# EAGLE board GF_RemoteDoorOpener_TX (EAGLE 7.5.0)
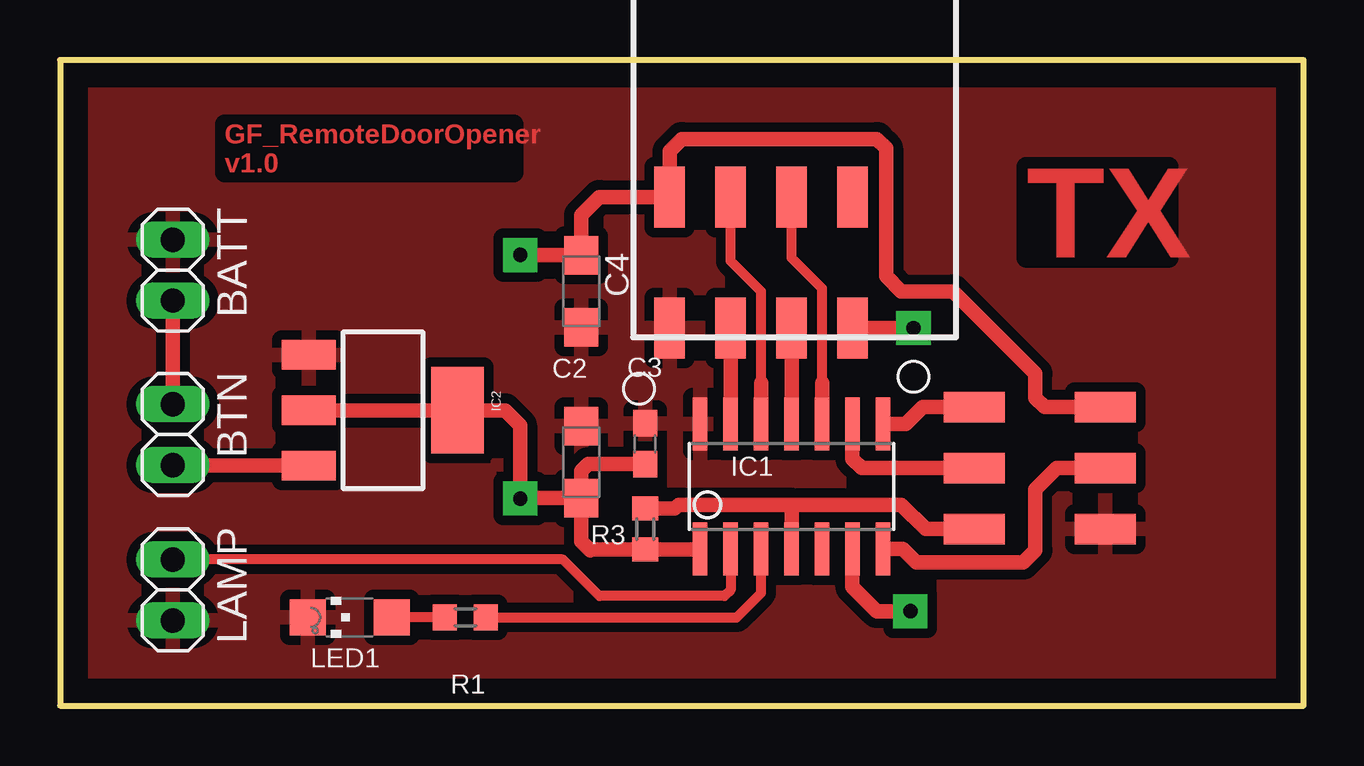
[diagram p0: board, top side]
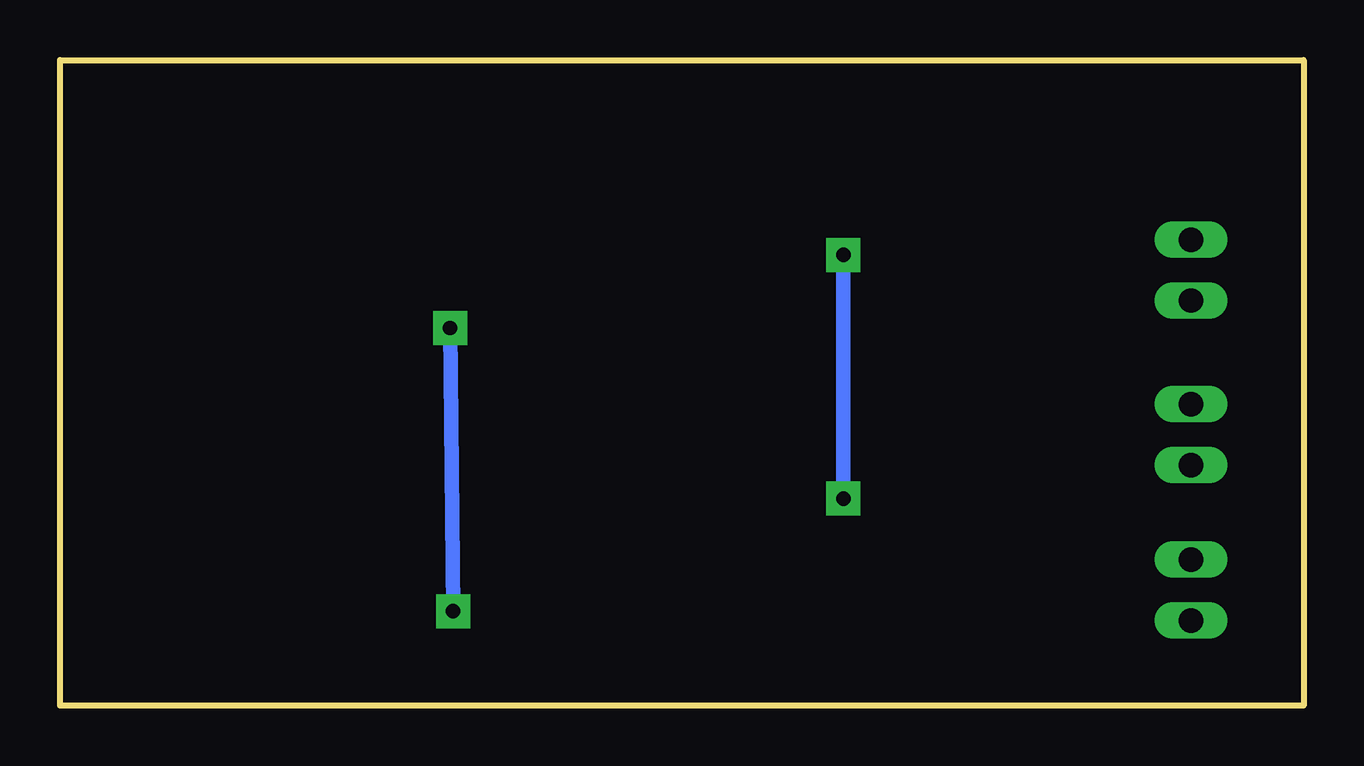
[diagram p1: board, bottom side, seen from below]

Size 51.82 x 26.92 mm. Coordinates in mm from the lower left corner, seen from the top.
Outline: 0,0 51.82,0 51.82,26.92 0,26.92 0,0
Copper layers (1*16): Top 0.035mm / dielectric 1.5mm / Bottom 0.035mm
Design rules "default *": minimum track width 10mil, minimum drill 24mil, track to track 8mil, track to pad 8mil, pad to pad 8mil, via to via 8mil, smd to smd 8mil, copper to edge 40mil, drill to drill 8mil, minimum pad ring 10mil, minimum via ring 8mil, stop-mask expansion 4mil, vias tented up to drill 0mil, thermal gap 16mil

## Footprints (pad centres in the part's own frame; a part is rotated, then mirrored left to right if it is on the bottom)
1X02 = drill 1.016 long: 1 -1.27,0; 2 1.27,0
SMC_A = smd 1.6 x 1.4: + -1.5,0; - 1.5,0
C0603 = smd 1.1 x 1: 1 -0.85,0; 2 0.85,0
SOIC14 = smd 0.61 x 2.21: 1 -3.81,-2.603; 2 -2.54,-2.603; 3 -1.27,-2.603; 4 0,-2.603; 5 1.27,-2.603; 6 2.54,-2.603; 7 3.81,-2.603; 8 3.81,2.603; 9 2.54,2.603; 10 1.27,2.603; 11 0,2.603; 12 -1.27,2.603; 13 -2.54,2.603; 14 -3.81,2.603
SOT223 = smd 1.219 x 2.235: 1 -2.311,-3.099; 2 0,-3.099; 3 2.311,-3.099 | smd 3.6 x 2.2: 4 0,3.099
2X3_SMD = smd 2.54 x 1.27: 1 -2.54,2.54; 2 2.92,2.54; 3 -2.54,0; 4 2.92,0; 5 -2.54,-2.54; 6 2.92,-2.54
CHIPLED_1206 = smd 1.5 x 1.5: A 0,-1.75; C 0,1.75
R0603 = smd 1 x 1.1: 1 -0.85,0; 2 0.85,0
2X4_SMD = smd 2.54 x 1.27: 1 -2.54,3.81; 2 2.92,3.81; 3 -2.54,1.27; 4 2.92,1.27; 5 -2.54,-1.27; 6 2.92,-1.27; 7 -2.54,-3.81; 8 2.92,-3.81

## Placement (x,y rotation side)
BATT  [1X02]  4.7,18.16 270 top
BTN  [1X02]  4.7,11.3 270 top
C2  4u7  [SMC_A]  21.72,10.16 90 top
C3  100n  [C0603]  24.38,10.92 90 top
C4  1uF  [SMC_A]  21.72,17.27 270 top
IC1  ATTINY44  [SOIC14]  30.48,9.14 0 top
IC2  [SOT223]  13.46,12.32 270 top
ISP  [2X3_SMD]  40.64,9.91 0 top
LAMP  [1X02]  4.7,4.83 270 top
LED1  [CHIPLED_1206]  12.06,3.68 90 top
R1  10k  [R0603]  16.89,3.68 0 top
R3  10k  [R0603]  24.38,7.37 270 top
U$2  2X4HEADER  [2X4_SMD]  29.21,18.29 90 top

## Library data of the parts
BATT BTN LAMP = pinhead+
C2-C4 R1 R3 = rcl
IC1 = attiny24_44_84
IC2 = SparkFun-PowerIC
ISP U$2 = mellis
LED1 = led

## Nets
BTN_LAMP: IC1.2 LAMP.1
GND: BATT.1 C2.- C3.2 C4.- IC1.14 IC2.1 ISP.6 LAMP.2 LED1.C U$2.1
MISO: IC1.8 ISP.1
MOSI: IC1.7 ISP.4
N$1: BATT.2 BTN.1
N$2: IC1.3 R1.2
N$3: LED1.A R1.1
N$4: BTN.2 IC2.3
RESET: IC1.4 ISP.5 R3.1
S_CE: IC1.13 U$2.3
S_CSN: IC1.12 U$2.4
S_IRQ: U$2.8
S_MISO: IC1.6 U$2.7
S_MOSI: IC1.10 U$2.6
S_SCK: IC1.11 U$2.5
SCK: IC1.9 ISP.3
VCC: C2.+ C3.1 C4.+ IC1.1 IC2.2 IC2.4 ISP.2 R3.2 U$2.2

## Tracks (layer width: path | path; a pad name or v marks a point on that pad's centre or on a via)
BTN_LAMP
  Top 0.406: IC1.2 27.94,4.83 27.69,4.57 22.48,4.57 20.95,6.1 LAMP.1
GND
  pour Top (isolate 0.406): 0,0 51.82,0 51.82,26.92 0,26.92
MISO
  Top 0.61: IC1.8 35.24,11.75 35.94,12.45 ISP.1
MOSI
  Top 0.61: IC1.7 35.12,6.54 35.69,5.97 40.13,5.97 40.64,6.48 40.64,9.02 41.53,9.91 ISP.4
N$1
  Top 0.61: BATT.2 BTN.1
N$2
  Top 0.406: R1.2 28.19,3.68 29.21,4.7 IC1.3
N$3
  Top 0.406: R1.1 LED1.A
N$4
  Top 0.61: IC2.3 4.72,10.01 BTN.2
RESET
  Top 0.61: IC1.4 30.48,8.38 | 30.48,8.38 25.78,8.38 25.61,8.22 R3.1 | 30.48,8.38 35.05,8.38 36.07,7.37 ISP.5
S_CE
  Top 0.61: IC1.13 U$2.3
S_CSN
  Top 0.406: 29.21,13.46 29.21,17.27 27.94,18.54 U$2.4
  Top 0.61: IC1.12 29.21,13.46
S_MISO  (via drill 0.6 pad 1.42)
  Top 0.61: v35.56,15.75 U$2.7 | v35.43,3.94 34.04,3.94 33.02,4.95 IC1.6
  Bottom 0.61: v35.56,15.75 v35.43,3.94
S_MOSI
  Top 0.406: 31.75,13.46 31.75,17.4 30.48,18.67 U$2.6
  Top 0.61: IC1.10 31.75,13.46
S_SCK
  Top 0.61: IC1.11 U$2.5
SCK
  Top 0.61: IC1.9 33.02,10.29 33.4,9.91 ISP.3
VCC  (via drill 0.6 pad 1.42)
  Top 0.61: IC1.1 26.64,6.52 R3.2 22.06,6.52 | 22.06,6.52 21.72,6.86 C2.+ | C3.1 22.01,10.07 21.72,9.78 C2.+ | ISP.2 41.02,12.45 40.64,12.83 40.64,13.84 37.21,17.27 35.05,17.27 34.42,17.91 34.42,23.24 34.04,23.62 25.91,23.62 25.4,23.11 U$2.2 22.48,21.21 21.72,20.45 C4.+ 21.82,18.8 v19.18,18.8 | C2.+ 19.33,8.66 v19.18,8.64 19.18,11.68 18.54,12.32 IC2.4 IC2.2 | 22.1,6.48 22.06,6.52
  Bottom 0.61: v19.18,8.64 v19.18,18.8

## Text on the board
Top: GF_RemoteDoorOpener / v1.0 | TX